# EAGLE board Breadboard Power Supply - SMD-Panel-v14 (EAGLE 6.6.0)
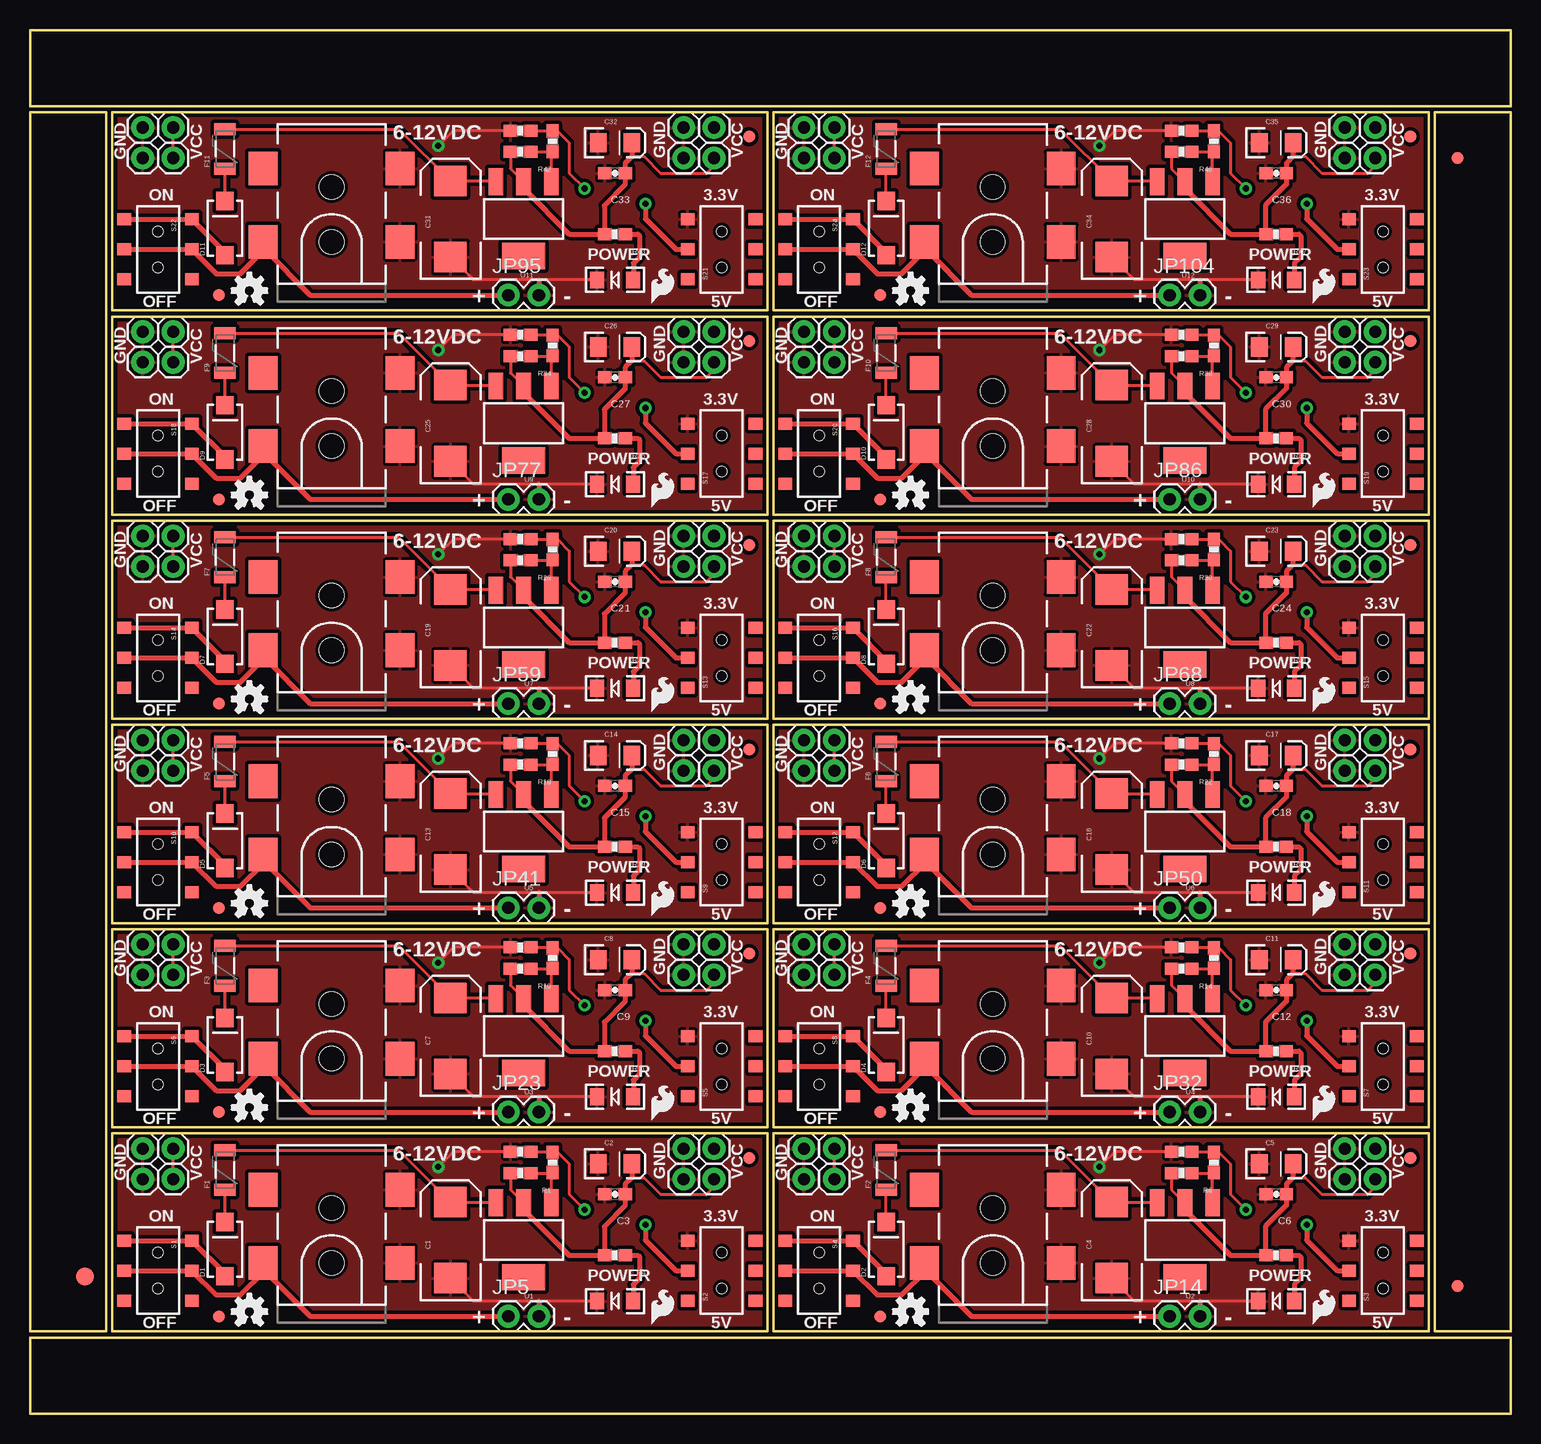
[diagram p0: board, top side]
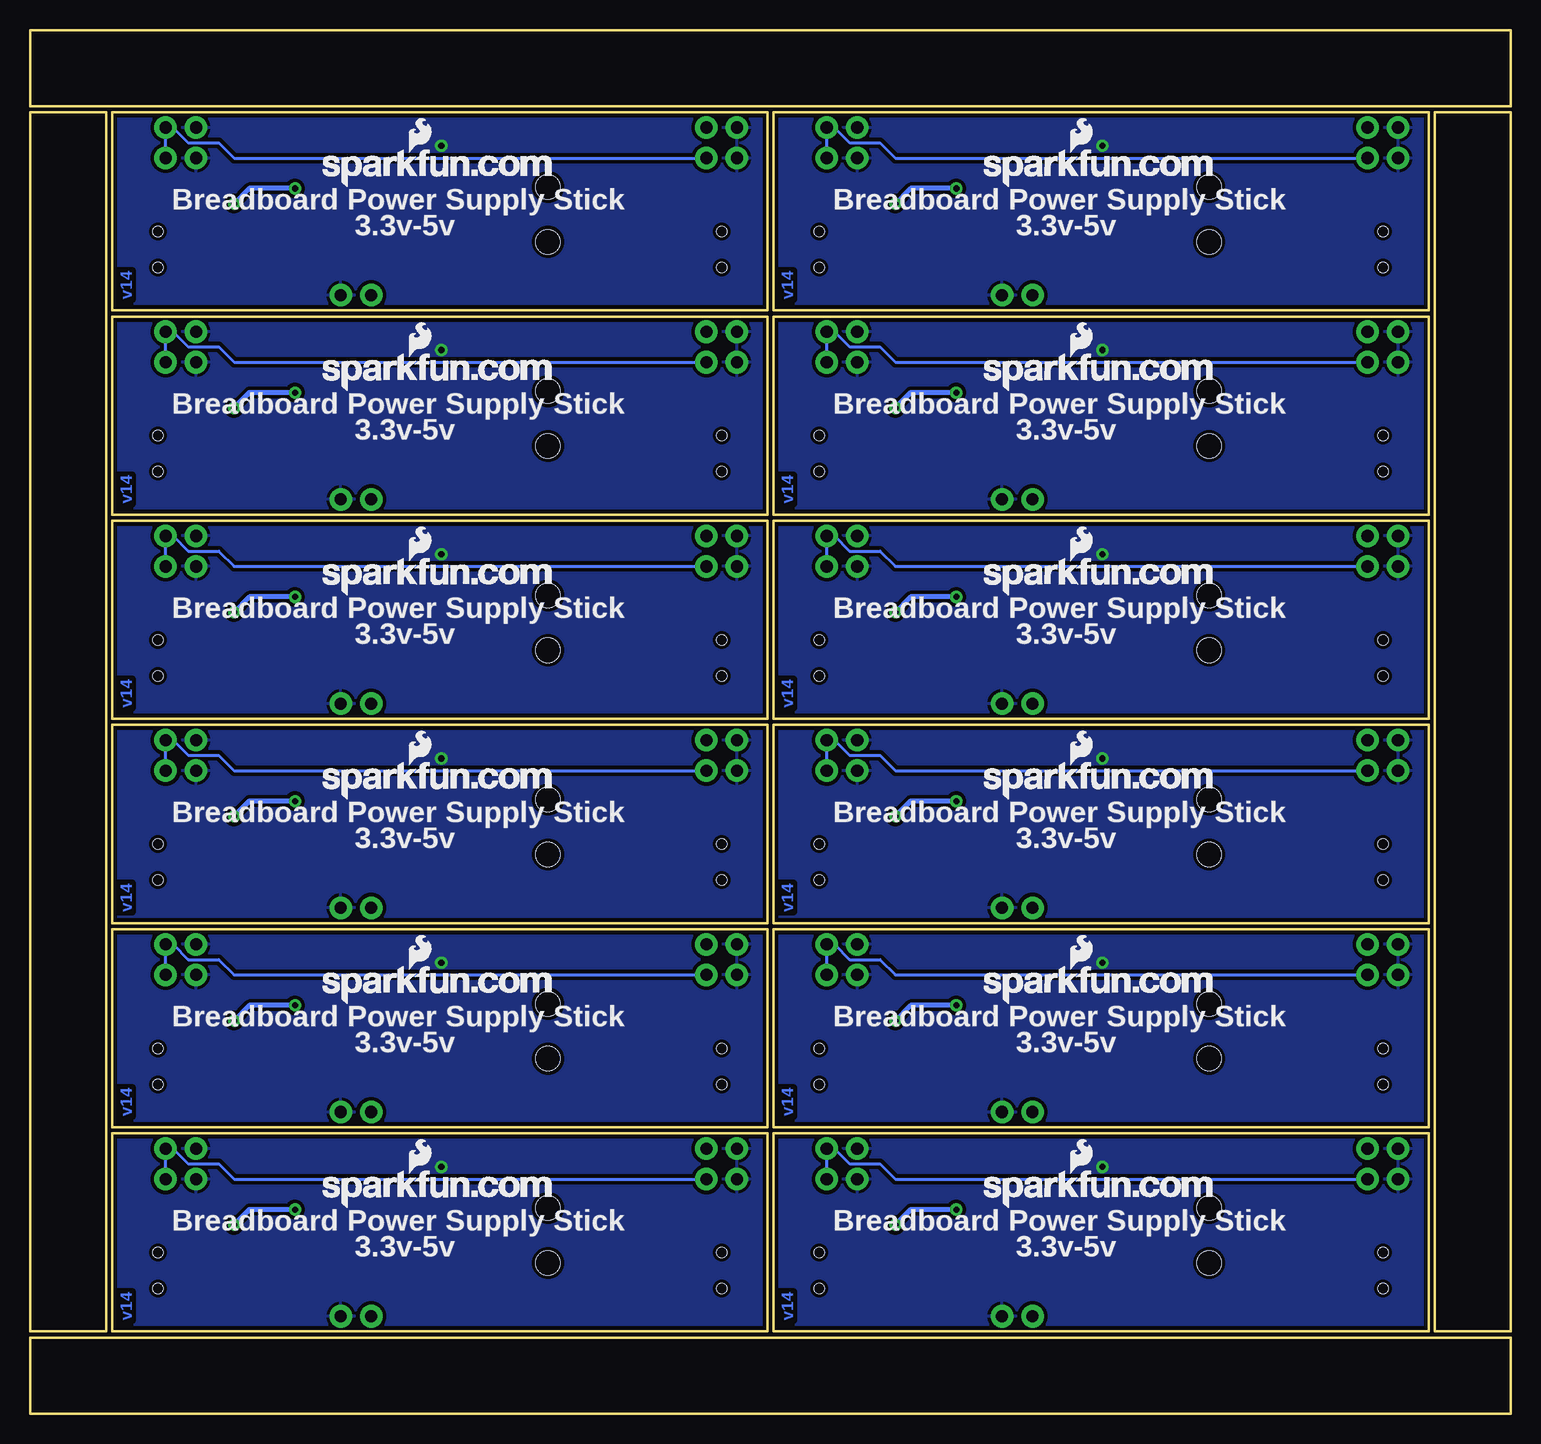
[diagram p1: board, bottom side, seen from below]

Size 123.44 x 115.32 mm. Coordinates in mm from the lower left corner, seen from the top.
Outline: 6.86,6.86 61.47,6.86 61.47,23.37 6.86,23.37 6.86,6.86
Outline: 61.98,6.86 116.59,6.86 116.59,23.37 61.98,23.37 61.98,6.86
Outline: 6.86,23.88 61.47,23.88 61.47,40.39 6.86,40.39 6.86,23.88
Outline: 61.98,23.88 116.59,23.88 116.59,40.39 61.98,40.39 61.98,23.88
Outline: 6.86,40.89 61.47,40.89 61.47,57.4 6.86,57.4 6.86,40.89
Outline: 61.98,40.89 116.59,40.89 116.59,57.4 61.98,57.4 61.98,40.89
Outline: 6.86,57.91 61.47,57.91 61.47,74.42 6.86,74.42 6.86,57.91
Outline: 61.98,57.91 116.59,57.91 116.59,74.42 61.98,74.42 61.98,57.91
Outline: 6.86,74.93 61.47,74.93 61.47,91.44 6.86,91.44 6.86,74.93
Outline: 61.98,74.93 116.59,74.93 116.59,91.44 61.98,91.44 61.98,74.93
Outline: 6.86,91.95 61.47,91.95 61.47,108.46 6.86,108.46 6.86,91.95
Outline: 61.98,91.95 116.59,91.95 116.59,108.46 61.98,108.46 61.98,91.95
Outline: 6.35,6.86 6.35,108.46 0,108.46 0,6.86 6.35,6.86
Outline: 0,0 123.44,0 123.44,6.35 0,6.35 0,0
Outline: 123.44,6.86 123.44,108.46 117.09,108.46 117.09,6.86 123.44,6.86
Outline: 123.44,115.32 0,115.32 0,108.97 123.44,108.97 123.44,115.32
Copper layers (1*16): Top 0.035mm / dielectric 1.5mm / Bottom 0.035mm
Design rules "SparkFun *": minimum track width 8mil, minimum drill 20mil, track to track 8mil, track to pad 8mil, pad to pad 8mil, via to via 8mil, smd to smd 8mil, copper to edge 10mil, drill to drill 8mil, minimum pad ring 12mil, minimum via ring 10mil, stop-mask expansion 4mil, vias tented up to drill 20mil, thermal gap 10mil
Net classes: 0 default: width 0.203 mm; 1 power: width 0.508 mm

## Footprints (pad centres in the part's own frame; a part is rotated, then mirrored left to right if it is on the bottom)
EIA7343 = smd 2.55 x 2.7: A 3.17,0; C -3.17,0
EIA3216 = smd 1.4 x 1.6: A 1.4,0; C -1.4,0
0603-CAP = smd 1.1 x 1: 1 -0.85,0; 2 0.85,0
SMA-DIODE-TYLERALT1 = smd 1.524 x 1.47: A -2.261,0; C 2.261,0
FIDUCIAL-1.5X3 = smd 1.5 x 1.5: 1 0,0
FIDUCIAL-1X2 = smd 1 x 1: 1 0,0
PTC-1206-WIDE = smd 1 x 1.8: 1 -1.654,0; 2 1.654,0
POWER_JACK_SMD = smd 2.8 x 2.4: GND 0,-5.7; P$4 6.1,-5.7; VIN0 0,5.7; VIN1 6.1,5.7 | hole 2.032: 0,0; 4.572,0
1X01 = drill 1.016 pad 1.88: 1 0,0
1X02 = drill 1.016 pad 1.88: 1 0,0; 2 2.54,0
LED-1206 = smd 1.2 x 1.4: A -1.5,0; C 1.5,0
0603-RES = smd 1.1 x 1: 1 -0.85,0; 2 0.85,0
AYZ0202 = smd 1 x 1.15: 1 -2.5,2.825; 2 0,2.825; 3 2.5,2.825; 4 -2.5,-2.825; 5 0,-2.825; 6 2.5,-2.825 | hole 0.85: 1.5,0; -1.5,0
SOT223 = smd 1.219 x 2.235: 1 -2.311,-3.099; 2 0,-3.099; 3 2.311,-3.099 | smd 3.6 x 2.2: 4 0,3.099

## Placement (x,y rotation side)
C1  100uF  [EIA7343]  35.05,14.48 90 top
C2  10uF  [EIA3216]  48.77,20.83 0 top
C3  0.1uF  [0603-CAP]  48.77,18.29 180 top
C4  100uF  [EIA7343]  90.17,14.48 90 top
C5  10uF  [EIA3216]  103.89,20.83 0 top
C6  0.1uF  [0603-CAP]  103.89,18.29 180 top
C7  100uF  [EIA7343]  35.05,31.5 90 top
C8  10uF  [EIA3216]  48.77,37.85 0 top
C9  0.1uF  [0603-CAP]  48.77,35.31 180 top
C10  100uF  [EIA7343]  90.17,31.5 90 top
C11  10uF  [EIA3216]  103.89,37.85 0 top
C12  0.1uF  [0603-CAP]  103.89,35.31 180 top
C13  100uF  [EIA7343]  35.05,48.51 90 top
C14  10uF  [EIA3216]  48.77,54.86 0 top
C15  0.1uF  [0603-CAP]  48.77,52.32 180 top
C16  100uF  [EIA7343]  90.17,48.51 90 top
C17  10uF  [EIA3216]  103.89,54.86 0 top
C18  0.1uF  [0603-CAP]  103.89,52.32 180 top
C19  100uF  [EIA7343]  35.05,65.53 90 top
C20  10uF  [EIA3216]  48.77,71.88 0 top
C21  0.1uF  [0603-CAP]  48.77,69.34 180 top
C22  100uF  [EIA7343]  90.17,65.53 90 top
C23  10uF  [EIA3216]  103.89,71.88 0 top
C24  0.1uF  [0603-CAP]  103.89,69.34 180 top
C25  100uF  [EIA7343]  35.05,82.55 90 top
C26  10uF  [EIA3216]  48.77,88.9 0 top
C27  0.1uF  [0603-CAP]  48.77,86.36 180 top
C28  100uF  [EIA7343]  90.17,82.55 90 top
C29  10uF  [EIA3216]  103.89,88.9 0 top
C30  0.1uF  [0603-CAP]  103.89,86.36 180 top
C31  100uF  [EIA7343]  35.05,99.57 90 top
C32  10uF  [EIA3216]  48.77,105.92 0 top
C33  0.1uF  [0603-CAP]  48.77,103.38 180 top
C34  100uF  [EIA7343]  90.17,99.57 90 top
C35  10uF  [EIA3216]  103.89,105.92 0 top
C36  0.1uF  [0603-CAP]  103.89,103.38 180 top
D1  1N4001  [SMA-DIODE-TYLERALT1]  16.26,13.72 90 top
D2  1N4001  [SMA-DIODE-TYLERALT1]  71.37,13.72 90 top
D3  1N4001  [SMA-DIODE-TYLERALT1]  16.26,30.73 90 top
D4  1N4001  [SMA-DIODE-TYLERALT1]  71.37,30.73 90 top
D5  1N4001  [SMA-DIODE-TYLERALT1]  16.26,47.75 90 top
D6  1N4001  [SMA-DIODE-TYLERALT1]  71.37,47.75 90 top
D7  1N4001  [SMA-DIODE-TYLERALT1]  16.26,64.77 90 top
D8  1N4001  [SMA-DIODE-TYLERALT1]  71.37,64.77 90 top
D9  1N4001  [SMA-DIODE-TYLERALT1]  16.26,81.79 90 top
D10  1N4001  [SMA-DIODE-TYLERALT1]  71.37,81.79 90 top
D11  1N4001  [SMA-DIODE-TYLERALT1]  16.26,98.81 90 top
D12  1N4001  [SMA-DIODE-TYLERALT1]  71.37,98.81 90 top
E$1  [FIDUCIAL-1.5X3]  4.57,11.43 0 top
E$4  [FIDUCIAL-1X2]  119,10.67 0 top
E$6  [FIDUCIAL-1X2]  119,104.65 180 top
F1  PTCSMD-W  [PTC-1206-WIDE]  16.26,20.32 90 top
F2  PTCSMD-W  [PTC-1206-WIDE]  71.37,20.32 90 top
F3  PTCSMD-W  [PTC-1206-WIDE]  16.26,37.34 90 top
F4  PTCSMD-W  [PTC-1206-WIDE]  71.37,37.34 90 top
F5  PTCSMD-W  [PTC-1206-WIDE]  16.26,54.36 90 top
F6  PTCSMD-W  [PTC-1206-WIDE]  71.37,54.36 90 top
F7  PTCSMD-W  [PTC-1206-WIDE]  16.26,71.37 90 top
F8  PTCSMD-W  [PTC-1206-WIDE]  71.37,71.37 90 top
F9  PTCSMD-W  [PTC-1206-WIDE]  16.26,88.39 90 top
F10  PTCSMD-W  [PTC-1206-WIDE]  71.37,88.39 90 top
F11  PTCSMD-W  [PTC-1206-WIDE]  16.26,105.41 90 top
F12  PTCSMD-W  [PTC-1206-WIDE]  71.37,105.41 90 top
J1  POWER_JACKSMD  [POWER_JACK_SMD]  25.15,12.57 90 top
J2  POWER_JACKSMD  [POWER_JACK_SMD]  80.26,12.57 90 top
J3  POWER_JACKSMD  [POWER_JACK_SMD]  25.15,29.59 90 top
J4  POWER_JACKSMD  [POWER_JACK_SMD]  80.26,29.59 90 top
J5  POWER_JACKSMD  [POWER_JACK_SMD]  25.15,46.61 90 top
J6  POWER_JACKSMD  [POWER_JACK_SMD]  80.26,46.61 90 top
J7  POWER_JACKSMD  [POWER_JACK_SMD]  25.15,63.63 90 top
J8  POWER_JACKSMD  [POWER_JACK_SMD]  80.26,63.63 90 top
J9  POWER_JACKSMD  [POWER_JACK_SMD]  25.15,80.64 90 top
J10  POWER_JACKSMD  [POWER_JACK_SMD]  80.26,80.64 90 top
J11  POWER_JACKSMD  [POWER_JACK_SMD]  25.15,97.66 90 top
J12  POWER_JACKSMD  [POWER_JACK_SMD]  80.26,97.66 90 top
JP1  M01PTH  [1X01]  9.4,22.1 0 top
JP2  M01PTH  [1X01]  11.94,22.1 0 top
JP3  M01PTH  [1X01]  57.02,22.1 0 top
JP4  M01PTH  [1X01]  54.48,22.1 0 top
JP5  [1X02]  39.88,8.13 0 top
JP6  M01PTH  [1X01]  9.4,19.56 0 top
JP7  M01PTH  [1X01]  11.94,19.56 0 top
JP8  M01PTH  [1X01]  57.02,19.56 0 top
JP9  M01PTH  [1X01]  54.48,19.56 0 top
JP10  M01PTH  [1X01]  64.52,22.1 0 top
JP11  M01PTH  [1X01]  67.06,22.1 0 top
JP12  M01PTH  [1X01]  112.14,22.1 0 top
JP13  M01PTH  [1X01]  109.6,22.1 0 top
JP14  [1X02]  95,8.13 0 top
JP15  M01PTH  [1X01]  64.52,19.56 0 top
JP16  M01PTH  [1X01]  67.06,19.56 0 top
JP17  M01PTH  [1X01]  112.14,19.56 0 top
JP18  M01PTH  [1X01]  109.6,19.56 0 top
JP19  M01PTH  [1X01]  9.4,39.12 0 top
JP20  M01PTH  [1X01]  11.94,39.12 0 top
JP21  M01PTH  [1X01]  57.02,39.12 0 top
JP22  M01PTH  [1X01]  54.48,39.12 0 top
JP23  [1X02]  39.88,25.15 0 top
JP24  M01PTH  [1X01]  9.4,36.58 0 top
JP25  M01PTH  [1X01]  11.94,36.58 0 top
JP26  M01PTH  [1X01]  57.02,36.58 0 top
JP27  M01PTH  [1X01]  54.48,36.58 0 top
JP28  M01PTH  [1X01]  64.52,39.12 0 top
JP29  M01PTH  [1X01]  67.06,39.12 0 top
JP30  M01PTH  [1X01]  112.14,39.12 0 top
JP31  M01PTH  [1X01]  109.6,39.12 0 top
JP32  [1X02]  95,25.15 0 top
JP33  M01PTH  [1X01]  64.52,36.58 0 top
JP34  M01PTH  [1X01]  67.06,36.58 0 top
JP35  M01PTH  [1X01]  112.14,36.58 0 top
JP36  M01PTH  [1X01]  109.6,36.58 0 top
JP37  M01PTH  [1X01]  9.4,56.13 0 top
JP38  M01PTH  [1X01]  11.94,56.13 0 top
JP39  M01PTH  [1X01]  57.02,56.13 0 top
JP40  M01PTH  [1X01]  54.48,56.13 0 top
JP41  [1X02]  39.88,42.16 0 top
JP42  M01PTH  [1X01]  9.4,53.59 0 top
JP43  M01PTH  [1X01]  11.94,53.59 0 top
JP44  M01PTH  [1X01]  57.02,53.59 0 top
JP45  M01PTH  [1X01]  54.48,53.59 0 top
JP46  M01PTH  [1X01]  64.52,56.13 0 top
JP47  M01PTH  [1X01]  67.06,56.13 0 top
JP48  M01PTH  [1X01]  112.14,56.13 0 top
JP49  M01PTH  [1X01]  109.6,56.13 0 top
JP50  [1X02]  95,42.16 0 top
JP51  M01PTH  [1X01]  64.52,53.59 0 top
JP52  M01PTH  [1X01]  67.06,53.59 0 top
JP53  M01PTH  [1X01]  112.14,53.59 0 top
JP54  M01PTH  [1X01]  109.6,53.59 0 top
JP55  M01PTH  [1X01]  9.4,73.15 0 top
JP56  M01PTH  [1X01]  11.94,73.15 0 top
JP57  M01PTH  [1X01]  57.02,73.15 0 top
JP58  M01PTH  [1X01]  54.48,73.15 0 top
JP59  [1X02]  39.88,59.18 0 top
JP60  M01PTH  [1X01]  9.4,70.61 0 top
JP61  M01PTH  [1X01]  11.94,70.61 0 top
JP62  M01PTH  [1X01]  57.02,70.61 0 top
JP63  M01PTH  [1X01]  54.48,70.61 0 top
JP64  M01PTH  [1X01]  64.52,73.15 0 top
JP65  M01PTH  [1X01]  67.06,73.15 0 top
JP66  M01PTH  [1X01]  112.14,73.15 0 top
JP67  M01PTH  [1X01]  109.6,73.15 0 top
JP68  [1X02]  95,59.18 0 top
JP69  M01PTH  [1X01]  64.52,70.61 0 top
JP70  M01PTH  [1X01]  67.06,70.61 0 top
JP71  M01PTH  [1X01]  112.14,70.61 0 top
JP72  M01PTH  [1X01]  109.6,70.61 0 top
JP73  M01PTH  [1X01]  9.4,90.17 0 top
JP74  M01PTH  [1X01]  11.94,90.17 0 top
JP75  M01PTH  [1X01]  57.02,90.17 0 top
JP76  M01PTH  [1X01]  54.48,90.17 0 top
JP77  [1X02]  39.88,76.2 0 top
JP78  M01PTH  [1X01]  9.4,87.63 0 top
JP79  M01PTH  [1X01]  11.94,87.63 0 top
JP80  M01PTH  [1X01]  57.02,87.63 0 top
JP81  M01PTH  [1X01]  54.48,87.63 0 top
JP82  M01PTH  [1X01]  64.52,90.17 0 top
JP83  M01PTH  [1X01]  67.06,90.17 0 top
JP84  M01PTH  [1X01]  112.14,90.17 0 top
JP85  M01PTH  [1X01]  109.6,90.17 0 top
JP86  [1X02]  95,76.2 0 top
JP87  M01PTH  [1X01]  64.52,87.63 0 top
JP88  M01PTH  [1X01]  67.06,87.63 0 top
JP89  M01PTH  [1X01]  112.14,87.63 0 top
JP90  M01PTH  [1X01]  109.6,87.63 0 top
JP91  M01PTH  [1X01]  9.4,107.19 0 top
JP92  M01PTH  [1X01]  11.94,107.19 0 top
JP93  M01PTH  [1X01]  57.02,107.19 0 top
JP94  M01PTH  [1X01]  54.48,107.19 0 top
JP95  [1X02]  39.88,93.22 0 top
JP96  M01PTH  [1X01]  9.4,104.65 0 top
JP97  M01PTH  [1X01]  11.94,104.65 0 top
JP98  M01PTH  [1X01]  57.02,104.65 0 top
JP99  M01PTH  [1X01]  54.48,104.65 0 top
JP100  M01PTH  [1X01]  64.52,107.19 0 top
JP101  M01PTH  [1X01]  67.06,107.19 0 top
JP102  M01PTH  [1X01]  112.14,107.19 0 top
JP103  M01PTH  [1X01]  109.6,107.19 0 top
JP104  [1X02]  95,93.22 0 top
JP105  M01PTH  [1X01]  64.52,104.65 0 top
JP106  M01PTH  [1X01]  67.06,104.65 0 top
JP107  M01PTH  [1X01]  112.14,104.65 0 top
JP108  M01PTH  [1X01]  109.6,104.65 0 top
LED1  Power  [LED-1206]  103.89,9.4 180 top
LED2  Power  [LED-1206]  48.77,9.4 180 top
LED3  Power  [LED-1206]  48.77,26.42 180 top
LED4  Power  [LED-1206]  103.89,26.42 180 top
LED5  Power  [LED-1206]  48.77,43.43 180 top
LED6  Power  [LED-1206]  103.89,43.43 180 top
LED7  Power  [LED-1206]  48.77,60.45 180 top
LED8  Power  [LED-1206]  103.89,60.45 180 top
LED9  Power  [LED-1206]  48.77,77.47 180 top
LED10  Power  [LED-1206]  103.89,77.47 180 top
LED11  Power  [LED-1206]  48.77,94.49 180 top
LED12  Power  [LED-1206]  103.89,94.49 180 top
LOGO1  OSHW-LOGOS  [OSHW-LOGO-S]  18.29,8.51 0 top
LOGO2  OSHW-LOGOS  [OSHW-LOGO-S]  73.41,8.51 0 top
LOGO3  OSHW-LOGOS  [OSHW-LOGO-S]  18.29,25.53 0 top
LOGO4  OSHW-LOGOS  [OSHW-LOGO-S]  73.41,25.53 0 top
LOGO5  OSHW-LOGOS  [OSHW-LOGO-S]  18.29,42.55 0 top
LOGO6  OSHW-LOGOS  [OSHW-LOGO-S]  73.41,42.55 0 top
LOGO7  OSHW-LOGOS  [OSHW-LOGO-S]  18.29,59.56 0 top
LOGO8  OSHW-LOGOS  [OSHW-LOGO-S]  73.41,59.56 0 top
LOGO9  OSHW-LOGOS  [OSHW-LOGO-S]  18.29,76.58 0 top
LOGO10  OSHW-LOGOS  [OSHW-LOGO-S]  73.41,76.58 0 top
LOGO11  OSHW-LOGOS  [OSHW-LOGO-S]  18.29,93.6 0 top
LOGO12  OSHW-LOGOS  [OSHW-LOGO-S]  73.41,93.6 0 top
R1  240  [0603-RES]  40.89,20.07 180 top
R2  390  [0603-RES]  43.56,20.95 270 top
R3  330  [0603-RES]  40.89,21.84 0 top
R4  330  [0603-RES]  48.77,13.21 180 top
R5  390  [0603-RES]  98.68,20.95 270 top
R6  240  [0603-RES]  96.01,20.07 180 top
R7  330  [0603-RES]  103.89,13.21 180 top
R8  330  [0603-RES]  96.01,21.84 0 top
R9  390  [0603-RES]  43.56,37.97 270 top
R10  240  [0603-RES]  40.89,37.08 180 top
R11  330  [0603-RES]  48.77,30.23 180 top
R12  330  [0603-RES]  40.89,38.86 0 top
R13  390  [0603-RES]  98.68,37.97 270 top
R14  240  [0603-RES]  96.01,37.08 180 top
R15  330  [0603-RES]  103.89,30.23 180 top
R16  330  [0603-RES]  96.01,38.86 0 top
R17  390  [0603-RES]  43.56,54.99 270 top
R18  240  [0603-RES]  40.89,54.1 180 top
R19  330  [0603-RES]  48.77,47.24 180 top
R20  330  [0603-RES]  40.89,55.88 0 top
R21  390  [0603-RES]  98.68,54.99 270 top
R22  240  [0603-RES]  96.01,54.1 180 top
R23  330  [0603-RES]  103.89,47.24 180 top
R24  330  [0603-RES]  96.01,55.88 0 top
R25  390  [0603-RES]  43.56,72.01 270 top
R26  240  [0603-RES]  40.89,71.12 180 top
R27  330  [0603-RES]  48.77,64.26 180 top
R28  330  [0603-RES]  40.89,72.9 0 top
R29  390  [0603-RES]  98.68,72.01 270 top
R30  240  [0603-RES]  96.01,71.12 180 top
R31  330  [0603-RES]  103.89,64.26 180 top
R32  330  [0603-RES]  96.01,72.9 0 top
R33  390  [0603-RES]  43.56,89.03 270 top
R34  240  [0603-RES]  40.89,88.14 180 top
R35  330  [0603-RES]  48.77,81.28 180 top
R36  330  [0603-RES]  40.89,89.92 0 top
R37  390  [0603-RES]  98.68,89.03 270 top
R38  240  [0603-RES]  96.01,88.14 180 top
R39  330  [0603-RES]  103.89,81.28 180 top
R40  330  [0603-RES]  96.01,89.92 0 top
R41  390  [0603-RES]  43.56,106.05 270 top
R42  240  [0603-RES]  40.89,105.16 180 top
R43  330  [0603-RES]  48.77,98.3 180 top
R44  330  [0603-RES]  40.89,106.93 0 top
R45  390  [0603-RES]  98.68,106.05 270 top
R46  240  [0603-RES]  96.01,105.16 180 top
R47  330  [0603-RES]  103.89,98.3 180 top
R48  330  [0603-RES]  96.01,106.93 0 top
S1  On/Off  [AYZ0202]  10.67,11.94 270 top
S2  Voltage  [AYZ0202]  57.66,11.94 90 top
S3  Voltage  [AYZ0202]  112.78,11.94 90 top
S4  On/Off  [AYZ0202]  65.79,11.94 270 top
S5  Voltage  [AYZ0202]  57.66,28.96 90 top
S6  On/Off  [AYZ0202]  10.67,28.96 270 top
S7  Voltage  [AYZ0202]  112.78,28.96 90 top
S8  On/Off  [AYZ0202]  65.79,28.96 270 top
S9  Voltage  [AYZ0202]  57.66,45.97 90 top
S10  On/Off  [AYZ0202]  10.67,45.97 270 top
S11  Voltage  [AYZ0202]  112.78,45.97 90 top
S12  On/Off  [AYZ0202]  65.79,45.97 270 top
S13  Voltage  [AYZ0202]  57.66,62.99 90 top
S14  On/Off  [AYZ0202]  10.67,62.99 270 top
S15  Voltage  [AYZ0202]  112.78,62.99 90 top
S16  On/Off  [AYZ0202]  65.79,62.99 270 top
S17  Voltage  [AYZ0202]  57.66,80.01 90 top
S18  On/Off  [AYZ0202]  10.67,80.01 270 top
S19  Voltage  [AYZ0202]  112.78,80.01 90 top
S20  On/Off  [AYZ0202]  65.79,80.01 270 top
S21  Voltage  [AYZ0202]  57.66,97.03 90 top
S22  On/Off  [AYZ0202]  10.67,97.03 270 top
S23  Voltage  [AYZ0202]  112.78,97.03 90 top
S24  On/Off  [AYZ0202]  65.79,97.03 270 top
U1  V_REG_317SMD  [SOT223]  41.15,14.48 180 top
U2  V_REG_317SMD  [SOT223]  96.27,14.48 180 top
U3  V_REG_317SMD  [SOT223]  41.15,31.5 180 top
U4  V_REG_317SMD  [SOT223]  96.27,31.5 180 top
U5  V_REG_317SMD  [SOT223]  41.15,48.51 180 top
U6  V_REG_317SMD  [SOT223]  96.27,48.51 180 top
U7  V_REG_317SMD  [SOT223]  41.15,65.53 180 top
U8  V_REG_317SMD  [SOT223]  96.27,65.53 180 top
U9  V_REG_317SMD  [SOT223]  41.15,82.55 180 top
U10  V_REG_317SMD  [SOT223]  96.27,82.55 180 top
U11  V_REG_317SMD  [SOT223]  41.15,99.57 180 top
U12  V_REG_317SMD  [SOT223]  96.27,99.57 180 top
U$1  LOGO-SFESK  [SFE-LOGO-FLAME]  51.82,7.49 0 top
U$2  LOGO-SFENEW  [SFE-NEW-WEBLOGO]  43.94,17.14 0 bottom
U$3  FIDUCIAL1X2  [FIDUCIAL-1X2]  15.75,8.13 0 top
U$4  FIDUCIAL1X2  [FIDUCIAL-1X2]  59.94,21.34 0 top
U$5  LOGO-SFESK  [SFE-LOGO-FLAME]  106.93,7.49 0 top
U$6  LOGO-SFENEW  [SFE-NEW-WEBLOGO]  99.06,17.14 0 bottom
U$7  FIDUCIAL1X2  [FIDUCIAL-1X2]  70.87,8.13 0 top
U$8  FIDUCIAL1X2  [FIDUCIAL-1X2]  115.06,21.34 0 top
U$9  LOGO-SFESK  [SFE-LOGO-FLAME]  51.82,24.51 0 top
U$10  LOGO-SFENEW  [SFE-NEW-WEBLOGO]  43.94,34.16 0 bottom
U$11  FIDUCIAL1X2  [FIDUCIAL-1X2]  15.75,25.15 0 top
U$12  FIDUCIAL1X2  [FIDUCIAL-1X2]  59.94,38.35 0 top
U$13  LOGO-SFESK  [SFE-LOGO-FLAME]  106.93,24.51 0 top
U$14  LOGO-SFENEW  [SFE-NEW-WEBLOGO]  99.06,34.16 0 bottom
U$15  FIDUCIAL1X2  [FIDUCIAL-1X2]  70.87,25.15 0 top
U$16  FIDUCIAL1X2  [FIDUCIAL-1X2]  115.06,38.35 0 top
U$17  LOGO-SFESK  [SFE-LOGO-FLAME]  51.82,41.53 0 top
U$18  LOGO-SFENEW  [SFE-NEW-WEBLOGO]  43.94,51.18 0 bottom
U$19  FIDUCIAL1X2  [FIDUCIAL-1X2]  15.75,42.16 0 top
U$20  FIDUCIAL1X2  [FIDUCIAL-1X2]  59.94,55.37 0 top
U$21  LOGO-SFESK  [SFE-LOGO-FLAME]  106.93,41.53 0 top
U$22  LOGO-SFENEW  [SFE-NEW-WEBLOGO]  99.06,51.18 0 bottom
U$23  FIDUCIAL1X2  [FIDUCIAL-1X2]  70.87,42.16 0 top
U$24  FIDUCIAL1X2  [FIDUCIAL-1X2]  115.06,55.37 0 top
U$25  LOGO-SFESK  [SFE-LOGO-FLAME]  51.82,58.55 0 top
U$26  LOGO-SFENEW  [SFE-NEW-WEBLOGO]  43.94,68.2 0 bottom
U$27  FIDUCIAL1X2  [FIDUCIAL-1X2]  15.75,59.18 0 top
U$28  FIDUCIAL1X2  [FIDUCIAL-1X2]  59.94,72.39 0 top
U$29  LOGO-SFESK  [SFE-LOGO-FLAME]  106.93,58.55 0 top
U$30  LOGO-SFENEW  [SFE-NEW-WEBLOGO]  99.06,68.2 0 bottom
U$31  FIDUCIAL1X2  [FIDUCIAL-1X2]  70.87,59.18 0 top
U$32  FIDUCIAL1X2  [FIDUCIAL-1X2]  115.06,72.39 0 top
U$33  LOGO-SFESK  [SFE-LOGO-FLAME]  51.82,75.56 0 top
U$34  LOGO-SFENEW  [SFE-NEW-WEBLOGO]  43.94,85.22 0 bottom
U$35  FIDUCIAL1X2  [FIDUCIAL-1X2]  15.75,76.2 0 top
U$36  FIDUCIAL1X2  [FIDUCIAL-1X2]  59.94,89.41 0 top
U$37  LOGO-SFESK  [SFE-LOGO-FLAME]  106.93,75.56 0 top
U$38  LOGO-SFENEW  [SFE-NEW-WEBLOGO]  99.06,85.22 0 bottom
U$39  FIDUCIAL1X2  [FIDUCIAL-1X2]  70.87,76.2 0 top
U$40  FIDUCIAL1X2  [FIDUCIAL-1X2]  115.06,89.41 0 top
U$41  LOGO-SFESK  [SFE-LOGO-FLAME]  51.82,92.58 0 top
U$42  LOGO-SFENEW  [SFE-NEW-WEBLOGO]  43.94,102.23 0 bottom
U$43  FIDUCIAL1X2  [FIDUCIAL-1X2]  15.75,93.22 0 top
U$44  FIDUCIAL1X2  [FIDUCIAL-1X2]  59.94,106.43 0 top
U$45  LOGO-SFESK  [SFE-LOGO-FLAME]  106.93,92.58 0 top
U$46  LOGO-SFENEW  [SFE-NEW-WEBLOGO]  99.06,102.23 0 bottom
U$47  FIDUCIAL1X2  [FIDUCIAL-1X2]  70.87,93.22 0 top
U$48  FIDUCIAL1X2  [FIDUCIAL-1X2]  115.06,106.43 0 top

## Library data of the parts
C1-C36 JP1-JP108 R1-R48 S1-S24 U1-U12 U$1-U$48 = SparkFun
D1-D12 = Testing
E$1 = SparkFun-Retired
E$4 E$6 LOGO1-LOGO12 = SparkFun-Aesthetics
F1-F12 = SparkFun-PowerIC
J1-J12 = SparkFun-Connectors; PROD_ID: CONN-08106; VALUE: 5.5x2.1mm Barrel
LED1-LED12 = SparkFun-Nate

## Nets
GND: C1.C C2.C C3.2 J1.GND J1.P$4 JP1.1 JP4.1 JP5.2 JP6.1 JP9.1 LED2.C R3.1 S2.3
GND1: C4.C C5.C C6.2 J2.GND J2.P$4 JP10.1 JP13.1 JP14.2 JP15.1 JP18.1 LED1.C R8.1 S3.3
GND2: C7.C C8.C C9.2 J3.GND J3.P$4 JP19.1 JP22.1 JP23.2 JP24.1 JP27.1 LED3.C R12.1 S5.3
GND3: C10.C C11.C C12.2 J4.GND J4.P$4 JP28.1 JP31.1 JP32.2 JP33.1 JP36.1 LED4.C R16.1 S7.3
GND4: C13.C C14.C C15.2 J5.GND J5.P$4 JP37.1 JP40.1 JP41.2 JP42.1 JP45.1 LED5.C R20.1 S9.3
GND5: C16.C C17.C C18.2 J6.GND J6.P$4 JP46.1 JP49.1 JP50.2 JP51.1 JP54.1 LED6.C R24.1 S11.3
GND6: C19.C C20.C C21.2 J7.GND J7.P$4 JP55.1 JP58.1 JP59.2 JP60.1 JP63.1 LED7.C R28.1 S13.3
GND7: C22.C C23.C C24.2 J8.GND J8.P$4 JP64.1 JP67.1 JP68.2 JP69.1 JP72.1 LED8.C R32.1 S15.3
GND8: C25.C C26.C C27.2 J9.GND J9.P$4 JP73.1 JP76.1 JP77.2 JP78.1 JP81.1 LED9.C R36.1 S17.3
GND9: C28.C C29.C C30.2 J10.GND J10.P$4 JP82.1 JP85.1 JP86.2 JP87.1 JP90.1 LED10.C R40.1 S19.3
GND10: C31.C C32.C C33.2 J11.GND J11.P$4 JP91.1 JP94.1 JP95.2 JP96.1 JP99.1 LED11.C R44.1 S21.3
GND11: C34.C C35.C C36.2 J12.GND J12.P$4 JP100.1 JP103.1 JP104.2 JP105.1 JP108.1 LED12.C R48.1 S23.3
N$1: D1.C F1.1
N$2: D1.A S1.1 S1.4
N$3: R5.2 R6.1 U2.1
N$4: R2.1 R3.2 S2.2
N$5: R1.1 R2.2 U1.1
N$6: LED1.A R7.1
N$7: D2.C F2.1
N$8: LED2.A R4.1
N$9: D2.A S4.1 S4.4
N$10: R5.1 R8.2 S3.2
N$11: R9.2 R10.1 U3.1
N$12: LED3.A R11.1
N$13: D3.C F3.1
N$14: D3.A S6.1 S6.4
N$15: R9.1 R12.2 S5.2
N$16: R13.2 R14.1 U4.1
N$17: LED4.A R15.1
N$18: D4.C F4.1
N$19: D4.A S8.1 S8.4
N$20: R13.1 R16.2 S7.2
N$21: R17.2 R18.1 U5.1
N$22: LED5.A R19.1
N$23: D5.C F5.1
N$24: D5.A S10.1 S10.4
N$25: R17.1 R20.2 S9.2
N$26: R21.2 R22.1 U6.1
N$27: LED6.A R23.1
N$28: D6.C F6.1
N$29: D6.A S12.1 S12.4
N$30: R21.1 R24.2 S11.2
N$31: R25.2 R26.1 U7.1
N$32: LED7.A R27.1
N$33: D7.C F7.1
N$34: D7.A S14.1 S14.4
N$35: R25.1 R28.2 S13.2
N$36: R29.2 R30.1 U8.1
N$37: LED8.A R31.1
N$38: D8.C F8.1
N$39: D8.A S16.1 S16.4
N$40: R29.1 R32.2 S15.2
N$41: R33.2 R34.1 U9.1
N$42: LED9.A R35.1
N$43: D9.C F9.1
N$44: D9.A S18.1 S18.4
N$45: R33.1 R36.2 S17.2
N$46: R37.2 R38.1 U10.1
N$47: LED10.A R39.1
N$48: D10.C F10.1
N$49: D10.A S20.1 S20.4
N$50: R37.1 R40.2 S19.2
N$51: R41.2 R42.1 U11.1
N$52: LED11.A R43.1
N$53: D11.C F11.1
N$54: D11.A S22.1 S22.4
N$55: R41.1 R44.2 S21.2
N$56: R45.2 R46.1 U12.1
N$57: LED12.A R47.1
N$58: D12.C F12.1
N$59: D12.A S24.1 S24.4
N$60: R45.1 R48.2 S23.2
RAW: C1.A F1.2 U1.3
RAW1: C4.A F2.2 U2.3
RAW2: C7.A F3.2 U3.3
RAW3: C10.A F4.2 U4.3
RAW4: C13.A F5.2 U5.3
RAW5: C16.A F6.2 U6.3
RAW6: C19.A F7.2 U7.3
RAW7: C22.A F8.2 U8.3
RAW8: C25.A F9.2 U9.3
RAW9: C28.A F10.2 U10.3
RAW10: C31.A F11.2 U11.3
RAW11: C34.A F12.2 U12.3
VCC: C2.A C3.1 JP2.1 JP3.1 JP7.1 JP8.1 R1.2 R4.2 U1.2
VCC1: C5.A C6.1 JP11.1 JP12.1 JP16.1 JP17.1 R6.2 R7.2 U2.2
VCC2: C8.A C9.1 JP20.1 JP21.1 JP25.1 JP26.1 R10.2 R11.2 U3.2
VCC3: C11.A C12.1 JP29.1 JP30.1 JP34.1 JP35.1 R14.2 R15.2 U4.2
VCC4: C14.A C15.1 JP38.1 JP39.1 JP43.1 JP44.1 R18.2 R19.2 U5.2
VCC5: C17.A C18.1 JP47.1 JP48.1 JP52.1 JP53.1 R22.2 R23.2 U6.2
VCC6: C20.A C21.1 JP56.1 JP57.1 JP61.1 JP62.1 R26.2 R27.2 U7.2
VCC7: C23.A C24.1 JP65.1 JP66.1 JP70.1 JP71.1 R30.2 R31.2 U8.2
VCC8: C26.A C27.1 JP74.1 JP75.1 JP79.1 JP80.1 R34.2 R35.2 U9.2
VCC9: C29.A C30.1 JP83.1 JP84.1 JP88.1 JP89.1 R38.2 R39.2 U10.2
VCC10: C32.A C33.1 JP92.1 JP93.1 JP97.1 JP98.1 R42.2 R43.2 U11.2
VCC11: C35.A C36.1 JP101.1 JP102.1 JP106.1 JP107.1 R46.2 R47.2 U12.2
VIN: J1.VIN0 JP5.1 S1.2 S1.5
VIN1: J2.VIN0 JP14.1 S4.2 S4.5
VIN2: J3.VIN0 JP23.1 S6.2 S6.5
VIN3: J4.VIN0 JP32.1 S8.2 S8.5
VIN4: J5.VIN0 JP41.1 S10.2 S10.5
VIN5: J6.VIN0 JP50.1 S12.2 S12.5
VIN6: J7.VIN0 JP59.1 S14.2 S14.5
VIN7: J8.VIN0 JP68.1 S16.2 S16.5
VIN8: J9.VIN0 JP77.1 S18.2 S18.5
VIN9: J10.VIN0 JP86.1 S20.2 S20.5
VIN10: J11.VIN0 JP95.1 S22.2 S22.5
VIN11: J12.VIN0 JP104.1 S24.2 S24.5

## Tracks (layer width: path | path; a pad name or v marks a point on that pad's centre or on a via)
GND  (via drill 0.51)
  Top 0.254: LED2.C 42.42,9.4 36.96,9.4 C1.C | R3.1 35.31,21.84 v34.04,20.57
  Top 0.406: 42.42,9.4 JP5.2
  pour Bottom (isolate 0.305): 6.86,23.37 61.47,23.37 61.47,6.86 6.86,6.86
  pour Top (isolate 0.305): 6.86,6.86 6.86,23.37 61.47,23.37 61.47,6.86
GND1  (via drill 0.51)
  Top 0.254: LED1.C 97.54,9.4 92.08,9.4 C4.C | R8.1 90.42,21.84 v89.15,20.57
  Top 0.406: 97.54,9.4 JP14.2
  pour Bottom (isolate 0.305): 61.98,23.37 116.59,23.37 116.59,6.86 61.98,6.86
  pour Top (isolate 0.305): 61.98,6.86 61.98,23.37 116.59,23.37 116.59,6.86
GND2  (via drill 0.51)
  Top 0.254: LED3.C 42.42,26.42 36.96,26.42 C7.C | R12.1 35.31,38.86 v34.04,37.59
  Top 0.406: 42.42,26.42 JP23.2
  pour Bottom (isolate 0.305): 6.86,40.39 61.47,40.39 61.47,23.88 6.86,23.88
  pour Top (isolate 0.305): 6.86,23.88 6.86,40.39 61.47,40.39 61.47,23.88
GND3  (via drill 0.51)
  Top 0.254: LED4.C 97.54,26.42 92.08,26.42 C10.C | R16.1 90.42,38.86 v89.15,37.59
  Top 0.406: 97.54,26.42 JP32.2
  pour Bottom (isolate 0.305): 61.98,40.39 116.59,40.39 116.59,23.88 61.98,23.88
  pour Top (isolate 0.305): 61.98,23.88 61.98,40.39 116.59,40.39 116.59,23.88
GND4  (via drill 0.51)
  Top 0.254: LED5.C 42.42,43.43 36.96,43.43 C13.C | R20.1 35.31,55.88 v34.04,54.61
  Top 0.406: 42.42,43.43 JP41.2
  pour Bottom (isolate 0.305): 6.86,57.4 61.47,57.4 61.47,40.89 6.86,40.89
  pour Top (isolate 0.305): 6.86,40.89 6.86,57.4 61.47,57.4 61.47,40.89
GND5  (via drill 0.51)
  Top 0.254: LED6.C 97.54,43.43 92.08,43.43 C16.C | R24.1 90.42,55.88 v89.15,54.61
  Top 0.406: 97.54,43.43 JP50.2
  pour Bottom (isolate 0.305): 61.98,57.4 116.59,57.4 116.59,40.89 61.98,40.89
  pour Top (isolate 0.305): 61.98,40.89 61.98,57.4 116.59,57.4 116.59,40.89
GND6  (via drill 0.51)
  Top 0.254: LED7.C 42.42,60.45 36.96,60.45 C19.C | R28.1 35.31,72.9 v34.04,71.63
  Top 0.406: 42.42,60.45 JP59.2
  pour Bottom (isolate 0.305): 6.86,74.42 61.47,74.42 61.47,57.91 6.86,57.91
  pour Top (isolate 0.305): 6.86,57.91 6.86,74.42 61.47,74.42 61.47,57.91
GND7  (via drill 0.51)
  Top 0.254: LED8.C 97.54,60.45 92.08,60.45 C22.C | R32.1 90.42,72.9 v89.15,71.63
  Top 0.406: 97.54,60.45 JP68.2
  pour Bottom (isolate 0.305): 61.98,74.42 116.59,74.42 116.59,57.91 61.98,57.91
  pour Top (isolate 0.305): 61.98,57.91 61.98,74.42 116.59,74.42 116.59,57.91
GND8  (via drill 0.51)
  Top 0.254: LED9.C 42.42,77.47 36.96,77.47 C25.C | R36.1 35.31,89.92 v34.04,88.65
  Top 0.406: 42.42,77.47 JP77.2
  pour Bottom (isolate 0.305): 6.86,91.44 61.47,91.44 61.47,74.93 6.86,74.93
  pour Top (isolate 0.305): 6.86,74.93 6.86,91.44 61.47,91.44 61.47,74.93
GND9  (via drill 0.51)
  Top 0.254: LED10.C 97.54,77.47 92.08,77.47 C28.C | R40.1 90.42,89.92 v89.15,88.65
  Top 0.406: 97.54,77.47 JP86.2
  pour Bottom (isolate 0.305): 61.98,91.44 116.59,91.44 116.59,74.93 61.98,74.93
  pour Top (isolate 0.305): 61.98,74.93 61.98,91.44 116.59,91.44 116.59,74.93
GND10  (via drill 0.51)
  Top 0.254: LED11.C 42.42,94.49 36.96,94.49 C31.C | R44.1 35.31,106.93 v34.04,105.66
  Top 0.406: 42.42,94.49 JP95.2
  pour Bottom (isolate 0.305): 6.86,108.46 61.47,108.46 61.47,91.95 6.86,91.95
  pour Top (isolate 0.305): 6.86,91.95 6.86,108.46 61.47,108.46 61.47,91.95
GND11  (via drill 0.51)
  Top 0.254: LED12.C 97.54,94.49 92.08,94.49 C34.C | R48.1 90.42,106.93 v89.15,105.66
  Top 0.406: 97.54,94.49 JP104.2
  pour Bottom (isolate 0.305): 61.98,108.46 116.59,108.46 116.59,91.95 61.98,91.95
  pour Top (isolate 0.305): 61.98,91.95 61.98,108.46 116.59,108.46 116.59,91.95
N$1
  Top 0.254: D1.C F1.1
N$2
  Top 0.406: S1.4 S1.1 16.26,11.68 D1.A
N$3
  Top 0.254: U2.1 98.58,20 R5.2 98.64,20.07 R6.1
N$4  (via drill 0.51)
  Top 0.254: v46.23,17.02 44.96,18.29 44.96,20.83 43.98,21.8 R2.1 43.52,21.84 R3.2
  Top 0.406: S2.2 53.85,11.94 51.31,14.48 v51.31,15.75
  Bottom 0.406: v46.23,17.02 50.04,17.02 v51.31,15.75
N$5
  Top 0.254: U1.1 43.46,20 R2.2 43.52,20.07 R1.1
N$6
  Top 0.406: 105.03,13.21 R7.1 105.79,13.21 105.92,13.08 105.92,11.3 105.41,10.79 105.41,9.42 LED1.A
N$7
  Top 0.254: D2.C F2.1
N$8
  Top 0.406: 49.91,13.21 R4.1 50.67,13.21 50.8,13.08 50.8,11.3 50.29,10.79 50.29,9.42 LED2.A
N$9
  Top 0.406: S4.4 S4.1 71.37,11.68 D2.A
N$10  (via drill 0.51)
  Top 0.254: v101.35,17.02 100.08,18.29 100.08,20.83 99.1,21.8 R5.1 98.64,21.84 R8.2
  Top 0.406: S3.2 108.97,11.94 106.43,14.48 v106.43,15.75
  Bottom 0.406: v101.35,17.02 105.16,17.02 v106.43,15.75
N$11
  Top 0.254: U3.1 43.46,37.02 R9.2 43.52,37.08 R10.1
N$12
  Top 0.406: 49.91,30.23 R11.1 50.67,30.23 50.8,30.1 50.8,28.32 50.29,27.81 50.29,26.44 LED3.A
N$13
  Top 0.254: D3.C F3.1
N$14
  Top 0.406: S6.4 S6.1 16.26,28.69 D3.A
N$15  (via drill 0.51)
  Top 0.254: v46.23,34.04 44.96,35.31 44.96,37.85 43.98,38.82 R9.1 43.52,38.86 R12.2
  Top 0.406: S5.2 53.85,28.96 51.31,31.5 v51.31,32.77
  Bottom 0.406: v46.23,34.04 50.04,34.04 v51.31,32.77
N$16
  Top 0.254: U4.1 98.58,37.02 R13.2 98.64,37.08 R14.1
N$17
  Top 0.406: 105.03,30.23 R15.1 105.79,30.23 105.92,30.1 105.92,28.32 105.41,27.81 105.41,26.44 LED4.A
N$18
  Top 0.254: D4.C F4.1
N$19
  Top 0.406: S8.4 S8.1 71.37,28.69 D4.A
N$20  (via drill 0.51)
  Top 0.254: v101.35,34.04 100.08,35.31 100.08,37.85 99.1,38.82 R13.1 98.64,38.86 R16.2
  Top 0.406: S7.2 108.97,28.96 106.43,31.5 v106.43,32.77
  Bottom 0.406: v101.35,34.04 105.16,34.04 v106.43,32.77
N$21
  Top 0.254: U5.1 43.46,54.04 R17.2 43.52,54.1 R18.1
N$22
  Top 0.406: 49.91,47.24 R19.1 50.67,47.24 50.8,47.12 50.8,45.34 50.29,44.83 50.29,43.46 LED5.A
N$23
  Top 0.254: D5.C F5.1
N$24
  Top 0.406: S10.4 S10.1 16.26,45.71 D5.A
N$25  (via drill 0.51)
  Top 0.254: v46.23,51.05 44.96,52.32 44.96,54.86 43.98,55.84 R17.1 43.52,55.88 R20.2
  Top 0.406: S9.2 53.85,45.97 51.31,48.51 v51.31,49.78
  Bottom 0.406: v46.23,51.05 50.04,51.05 v51.31,49.78
N$26
  Top 0.254: U6.1 98.58,54.04 R21.2 98.64,54.1 R22.1
N$27
  Top 0.406: 105.03,47.24 R23.1 105.79,47.24 105.92,47.12 105.92,45.34 105.41,44.83 105.41,43.46 LED6.A
N$28
  Top 0.254: D6.C F6.1
N$29
  Top 0.406: S12.4 S12.1 71.37,45.71 D6.A
N$30  (via drill 0.51)
  Top 0.254: v101.35,51.05 100.08,52.32 100.08,54.86 99.1,55.84 R21.1 98.64,55.88 R24.2
  Top 0.406: S11.2 108.97,45.97 106.43,48.51 v106.43,49.78
  Bottom 0.406: v101.35,51.05 105.16,51.05 v106.43,49.78
N$31
  Top 0.254: U7.1 43.46,71.06 R25.2 43.52,71.12 R26.1
N$32
  Top 0.406: 49.91,64.26 R27.1 50.67,64.26 50.8,64.14 50.8,62.36 50.29,61.85 50.29,60.48 LED7.A
N$33
  Top 0.254: D7.C F7.1
N$34
  Top 0.406: S14.4 S14.1 16.26,62.73 D7.A
N$35  (via drill 0.51)
  Top 0.254: v46.23,68.07 44.96,69.34 44.96,71.88 43.98,72.86 R25.1 43.52,72.9 R28.2
  Top 0.406: S13.2 53.85,62.99 51.31,65.53 v51.31,66.8
  Bottom 0.406: v46.23,68.07 50.04,68.07 v51.31,66.8
N$36
  Top 0.254: U8.1 98.58,71.06 R29.2 98.64,71.12 R30.1
N$37
  Top 0.406: 105.03,64.26 R31.1 105.79,64.26 105.92,64.14 105.92,62.36 105.41,61.85 105.41,60.48 LED8.A
N$38
  Top 0.254: D8.C F8.1
N$39
  Top 0.406: S16.4 S16.1 71.37,62.73 D8.A
N$40  (via drill 0.51)
  Top 0.254: v101.35,68.07 100.08,69.34 100.08,71.88 99.1,72.86 R29.1 98.64,72.9 R32.2
  Top 0.406: S15.2 108.97,62.99 106.43,65.53 v106.43,66.8
  Bottom 0.406: v101.35,68.07 105.16,68.07 v106.43,66.8
N$41
  Top 0.254: U9.1 43.46,88.08 R33.2 43.52,88.14 R34.1
N$42
  Top 0.406: 49.91,81.28 R35.1 50.67,81.28 50.8,81.15 50.8,79.38 50.29,78.87 50.29,77.49 LED9.A
N$43
  Top 0.254: D9.C F9.1
N$44
  Top 0.406: S18.4 S18.1 16.26,79.75 D9.A
N$45  (via drill 0.51)
  Top 0.254: v46.23,85.09 44.96,86.36 44.96,88.9 43.98,89.88 R33.1 43.52,89.92 R36.2
  Top 0.406: S17.2 53.85,80.01 51.31,82.55 v51.31,83.82
  Bottom 0.406: v46.23,85.09 50.04,85.09 v51.31,83.82
N$46
  Top 0.254: U10.1 98.58,88.08 R37.2 98.64,88.14 R38.1
N$47
  Top 0.406: 105.03,81.28 R39.1 105.79,81.28 105.92,81.15 105.92,79.38 105.41,78.87 105.41,77.49 LED10.A
N$48
  Top 0.254: D10.C F10.1
N$49
  Top 0.406: S20.4 S20.1 71.37,79.75 D10.A
N$50  (via drill 0.51)
  Top 0.254: v101.35,85.09 100.08,86.36 100.08,88.9 99.1,89.88 R37.1 98.64,89.92 R40.2
  Top 0.406: S19.2 108.97,80.01 106.43,82.55 v106.43,83.82
  Bottom 0.406: v101.35,85.09 105.16,85.09 v106.43,83.82
N$51
  Top 0.254: U11.1 43.46,105.09 R41.2 43.52,105.16 R42.1
N$52
  Top 0.406: 49.91,98.3 R43.1 50.67,98.3 50.8,98.17 50.8,96.39 50.29,95.89 50.29,94.51 LED11.A
N$53
  Top 0.254: D11.C F11.1
N$54
  Top 0.406: S22.4 S22.1 16.26,96.77 D11.A
N$55  (via drill 0.51)
  Top 0.254: v46.23,102.11 44.96,103.38 44.96,105.92 43.98,106.89 R41.1 43.52,106.93 R44.2
  Top 0.406: S21.2 53.85,97.03 51.31,99.57 v51.31,100.84
  Bottom 0.406: v46.23,102.11 50.04,102.11 v51.31,100.84
N$56
  Top 0.254: U12.1 98.58,105.09 R45.2 98.64,105.16 R46.1
N$57
  Top 0.406: 105.03,98.3 R47.1 105.79,98.3 105.92,98.17 105.92,96.39 105.41,95.89 105.41,94.51 LED12.A
N$58
  Top 0.254: D12.C F12.1
N$59
  Top 0.406: S24.4 S24.1 71.37,96.77 D12.A
N$60  (via drill 0.51)
  Top 0.254: v101.35,102.11 100.08,103.38 100.08,105.92 99.1,106.89 R45.1 98.64,106.93 R48.2
  Top 0.406: S23.2 108.97,97.03 106.43,99.57 v106.43,100.84
  Bottom 0.406: v101.35,102.11 105.16,102.11 v106.43,100.84
RAW
  Top 0.254: F1.2 30.73,21.97 C1.A 38.77,17.65 U1.3
RAW1
  Top 0.254: F2.2 85.84,21.97 C4.A 93.88,17.65 U2.3
RAW2
  Top 0.254: F3.2 30.73,38.99 C7.A 38.77,34.67 U3.3
RAW3
  Top 0.254: F4.2 85.84,38.99 C10.A 93.88,34.67 U4.3
RAW4
  Top 0.254: F5.2 30.73,56.01 C13.A 38.77,51.68 U5.3
RAW5
  Top 0.254: F6.2 85.84,56.01 C16.A 93.88,51.68 U6.3
RAW6
  Top 0.254: F7.2 30.73,73.03 C19.A 38.77,68.7 U7.3
RAW7
  Top 0.254: F8.2 85.84,73.03 C22.A 93.88,68.7 U8.3
RAW8
  Top 0.254: F9.2 30.73,90.05 C25.A 38.77,85.72 U9.3
RAW9
  Top 0.254: F10.2 85.84,90.05 C28.A 93.88,85.72 U10.3
RAW10
  Top 0.254: F11.2 30.73,107.06 C31.A 38.77,102.74 U11.3
RAW11
  Top 0.254: F12.2 85.84,107.06 C34.A 93.88,102.74 U12.3
VCC
  Top 0.254: JP7.1 JP2.1 | R1.2 40.04,18.68 U1.2 | 50.17,19.69 51.18,19.69 52.58,18.29 56.39,18.29 57.02,18.92 JP8.1
  Top 0.406: C2.A 50.04,20.83 | U1.2 41.15,17.02 44.96,13.21 R4.2 47.88,13.25 47.88,15.62 49.62,17.36 C3.1 49.62,19.14 50.17,19.69 C2.A | 50.42,20.57 arc-90 C2.A
  Bottom 0.254: JP7.1 51.31,19.56 52.58,20.83 55.12,20.83 56.39,22.1 JP3.1 JP8.1
VCC1
  Top 0.254: JP16.1 JP11.1 | R6.2 95.16,18.68 U2.2 | 105.29,19.69 106.3,19.69 107.7,18.29 111.51,18.29 112.14,18.92 JP17.1
  Top 0.406: C5.A 105.16,20.83 | U2.2 96.27,17.02 100.08,13.21 R7.2 103,13.25 103,15.62 104.74,17.36 C6.1 104.74,19.14 105.29,19.69 C5.A | 105.54,20.57 arc-90 C5.A
  Bottom 0.254: JP16.1 106.43,19.56 107.7,20.83 110.24,20.83 111.51,22.1 JP12.1 JP17.1
VCC2
  Top 0.254: JP25.1 JP20.1 | R10.2 40.04,35.7 U3.2 | 50.17,36.71 51.18,36.71 52.58,35.31 56.39,35.31 57.02,35.94 JP26.1
  Top 0.406: C8.A 50.04,37.85 | U3.2 41.15,34.04 44.96,30.23 R11.2 47.88,30.27 47.88,32.64 49.62,34.38 C9.1 49.62,36.16 50.17,36.71 C8.A | 50.42,37.59 arc-90 C8.A
  Bottom 0.254: JP25.1 51.31,36.58 52.58,37.85 55.12,37.85 56.39,39.12 JP21.1 JP26.1
VCC3
  Top 0.254: JP34.1 JP29.1 | R14.2 95.16,35.7 U4.2 | 105.29,36.71 106.3,36.71 107.7,35.31 111.51,35.31 112.14,35.94 JP35.1
  Top 0.406: C11.A 105.16,37.85 | U4.2 96.27,34.04 100.08,30.23 R15.2 103,30.27 103,32.64 104.74,34.38 C12.1 104.74,36.16 105.29,36.71 C11.A | 105.54,37.59 arc-90 C11.A
  Bottom 0.254: JP34.1 106.43,36.58 107.7,37.85 110.24,37.85 111.51,39.12 JP30.1 JP35.1
VCC4
  Top 0.254: JP43.1 JP38.1 | R18.2 40.04,52.72 U5.2 | 50.17,53.72 51.18,53.72 52.58,52.32 56.39,52.32 57.02,52.96 JP44.1
  Top 0.406: C14.A 50.04,54.86 | U5.2 41.15,51.05 44.96,47.24 R19.2 47.88,47.28 47.88,49.66 49.62,51.4 C15.1 49.62,53.17 50.17,53.72 C14.A | 50.42,54.61 arc-90 C14.A
  Bottom 0.254: JP43.1 51.31,53.59 52.58,54.86 55.12,54.86 56.39,56.13 JP39.1 JP44.1
VCC5
  Top 0.254: JP52.1 JP47.1 | R22.2 95.16,52.72 U6.2 | 105.29,53.72 106.3,53.72 107.7,52.32 111.51,52.32 112.14,52.96 JP53.1
  Top 0.406: C17.A 105.16,54.86 | U6.2 96.27,51.05 100.08,47.24 R23.2 103,47.28 103,49.66 104.74,51.4 C18.1 104.74,53.17 105.29,53.72 C17.A | 105.54,54.61 arc-90 C17.A
  Bottom 0.254: JP52.1 106.43,53.59 107.7,54.86 110.24,54.86 111.51,56.13 JP48.1 JP53.1
VCC6
  Top 0.254: JP61.1 JP56.1 | R26.2 40.04,69.73 U7.2 | 50.17,70.74 51.18,70.74 52.58,69.34 56.39,69.34 57.02,69.98 JP62.1
  Top 0.406: C20.A 50.04,71.88 | U7.2 41.15,68.07 44.96,64.26 R27.2 47.88,64.3 47.88,66.67 49.62,68.41 C21.1 49.62,70.19 50.17,70.74 C20.A | 50.42,71.63 arc-90 C20.A
  Bottom 0.254: JP61.1 51.31,70.61 52.58,71.88 55.12,71.88 56.39,73.15 JP57.1 JP62.1
VCC7
  Top 0.254: JP70.1 JP65.1 | R30.2 95.16,69.73 U8.2 | 105.29,70.74 106.3,70.74 107.7,69.34 111.51,69.34 112.14,69.98 JP71.1
  Top 0.406: C23.A 105.16,71.88 | U8.2 96.27,68.07 100.08,64.26 R31.2 103,64.3 103,66.67 104.74,68.41 C24.1 104.74,70.19 105.29,70.74 C23.A | 105.54,71.63 arc-90 C23.A
  Bottom 0.254: JP70.1 106.43,70.61 107.7,71.88 110.24,71.88 111.51,73.15 JP66.1 JP71.1
VCC8
  Top 0.254: JP79.1 JP74.1 | R34.2 40.04,86.75 U9.2 | 50.17,87.76 51.18,87.76 52.58,86.36 56.39,86.36 57.02,87 JP80.1
  Top 0.406: C26.A 50.04,88.9 | U9.2 41.15,85.09 44.96,81.28 R35.2 47.88,81.32 47.88,83.69 49.62,85.43 C27.1 49.62,87.21 50.17,87.76 C26.A | 50.42,88.65 arc-90 C26.A
  Bottom 0.254: JP79.1 51.31,87.63 52.58,88.9 55.12,88.9 56.39,90.17 JP75.1 JP80.1
VCC9
  Top 0.254: JP88.1 JP83.1 | R38.2 95.16,86.75 U10.2 | 105.29,87.76 106.3,87.76 107.7,86.36 111.51,86.36 112.14,87 JP89.1
  Top 0.406: C29.A 105.16,88.9 | U10.2 96.27,85.09 100.08,81.28 R39.2 103,81.32 103,83.69 104.74,85.43 C30.1 104.74,87.21 105.29,87.76 C29.A | 105.54,88.65 arc-90 C29.A
  Bottom 0.254: JP88.1 106.43,87.63 107.7,88.9 110.24,88.9 111.51,90.17 JP84.1 JP89.1
VCC10
  Top 0.254: JP97.1 JP92.1 | R42.2 40.04,103.77 U11.2 | 50.17,104.78 51.18,104.78 52.58,103.38 56.39,103.38 57.02,104.01 JP98.1
  Top 0.406: C32.A 50.04,105.92 | U11.2 41.15,102.11 44.96,98.3 R43.2 47.88,98.34 47.88,100.71 49.62,102.45 C33.1 49.62,104.23 50.17,104.78 C32.A | 50.42,105.66 arc-90 C32.A
  Bottom 0.254: JP97.1 51.31,104.65 52.58,105.92 55.12,105.92 56.39,107.19 JP93.1 JP98.1
VCC11
  Top 0.254: JP106.1 JP101.1 | R46.2 95.16,103.77 U12.2 | 105.29,104.78 106.3,104.78 107.7,103.38 111.51,103.38 112.14,104.01 JP107.1
  Top 0.406: C35.A 105.16,105.92 | U12.2 96.27,102.11 100.08,98.3 R47.2 103,98.34 103,100.71 104.74,102.45 C36.1 104.74,104.23 105.29,104.78 C35.A | 105.54,105.66 arc-90 C35.A
  Bottom 0.254: JP106.1 106.43,104.65 107.7,105.92 110.24,105.92 111.51,107.19 JP102.1 JP107.1
VIN
  Top 0.406: S1.5 S1.2 15.53,9.91 17.53,9.91 19.56,11.94 | JP5.1 23.37,8.13 19.56,11.94 | J1.VIN0 19.45,12.05 19.56,11.94
VIN1
  Top 0.406: S4.5 S4.2 70.64,9.91 72.64,9.91 74.68,11.94 | JP14.1 78.49,8.13 74.68,11.94 | J2.VIN0 74.56,12.05 74.68,11.94
VIN2
  Top 0.406: S6.5 S6.2 15.53,26.92 17.53,26.92 19.56,28.96 | JP23.1 23.37,25.15 19.56,28.96 | J3.VIN0 19.45,29.07 19.56,28.96
VIN3
  Top 0.406: S8.5 S8.2 70.64,26.92 72.64,26.92 74.68,28.96 | JP32.1 78.49,25.15 74.68,28.96 | J4.VIN0 74.56,29.07 74.68,28.96
VIN4
  Top 0.406: S10.5 S10.2 15.53,43.94 17.53,43.94 19.56,45.97 | JP41.1 23.37,42.16 19.56,45.97 | J5.VIN0 19.45,46.09 19.56,45.97
VIN5
  Top 0.406: S12.5 S12.2 70.64,43.94 72.64,43.94 74.68,45.97 | JP50.1 78.49,42.16 74.68,45.97 | J6.VIN0 74.56,46.09 74.68,45.97
VIN6
  Top 0.406: S14.5 S14.2 15.53,60.96 17.53,60.96 19.56,62.99 | JP59.1 23.37,59.18 19.56,62.99 | J7.VIN0 19.45,63.1 19.56,62.99
VIN7
  Top 0.406: S16.5 S16.2 70.64,60.96 72.64,60.96 74.68,62.99 | JP68.1 78.49,59.18 74.68,62.99 | J8.VIN0 74.56,63.1 74.68,62.99
VIN8
  Top 0.406: S18.5 S18.2 15.53,77.98 17.53,77.98 19.56,80.01 | JP77.1 23.37,76.2 19.56,80.01 | J9.VIN0 19.45,80.12 19.56,80.01
VIN9
  Top 0.406: S20.5 S20.2 70.64,77.98 72.64,77.98 74.68,80.01 | JP86.1 78.49,76.2 74.68,80.01 | J10.VIN0 74.56,80.12 74.68,80.01
VIN10
  Top 0.406: S22.5 S22.2 15.53,95 17.53,95 19.56,97.03 | JP95.1 23.37,93.22 19.56,97.03 | J11.VIN0 19.45,97.14 19.56,97.03
VIN11
  Top 0.406: S24.5 S24.2 70.64,95 72.64,95 74.68,97.03 | JP104.1 78.49,93.22 74.68,97.03 | J12.VIN0 74.56,97.14 74.68,97.03

## Text on the board
Bottom: v14 | v14 | v14 | v14 | v14 | v14 | v14 | v14 | v14 | v14 | v14 | v14
tPlace: 6-12VDC | 6-12VDC | GND | VCC | GND | VCC | GND | VCC | GND | VCC | ON | 3.3V | ON | 3.3V | POWER | POWER | OFF | + | - | 5V | OFF | + | - | 5V | 6-12VDC | 6-12VDC | GND | VCC | GND | VCC | GND | VCC | GND | VCC | ON | 3.3V | ON | 3.3V | POWER | POWER | OFF | + | - | 5V | OFF | + | - | 5V | 6-12VDC | 6-12VDC | GND | VCC | GND | VCC | GND | VCC | GND | VCC | ON | 3.3V | ON | 3.3V | POWER | POWER | OFF | + | - | 5V | OFF | + | - | 5V | 6-12VDC | 6-12VDC | GND | VCC | GND | VCC | GND | VCC | GND | VCC | ON | 3.3V | ON | 3.3V | POWER | POWER | OFF | + | - | 5V | OFF | + | - | 5V | 6-12VDC | 6-12VDC | GND | VCC | GND | VCC | GND | VCC | GND | VCC | ON | 3.3V | ON | 3.3V | POWER | POWER | OFF | + | - | 5V | OFF | + | - | 5V | 6-12VDC | 6-12VDC | GND | VCC | GND | VCC | GND | VCC | GND | VCC | ON | 3.3V | ON | 3.3V | POWER | POWER | OFF | + | - | 5V | OFF | + | - | 5V
bPlace: Breadboard Power Supply Stick | Breadboard Power Supply Stick | 3.3v-5v | 3.3v-5v | Breadboard Power Supply Stick | Breadboard Power Supply Stick | 3.3v-5v | 3.3v-5v | Breadboard Power Supply Stick | Breadboard Power Supply Stick | 3.3v-5v | 3.3v-5v | Breadboard Power Supply Stick | Breadboard Power Supply Stick | 3.3v-5v | 3.3v-5v | Breadboard Power Supply Stick | Breadboard Power Supply Stick | 3.3v-5v | 3.3v-5v | Breadboard Power Supply Stick | Breadboard Power Supply Stick | 3.3v-5v | 3.3v-5v